# EAGLE board 7-segment (EAGLE 7.5.0)
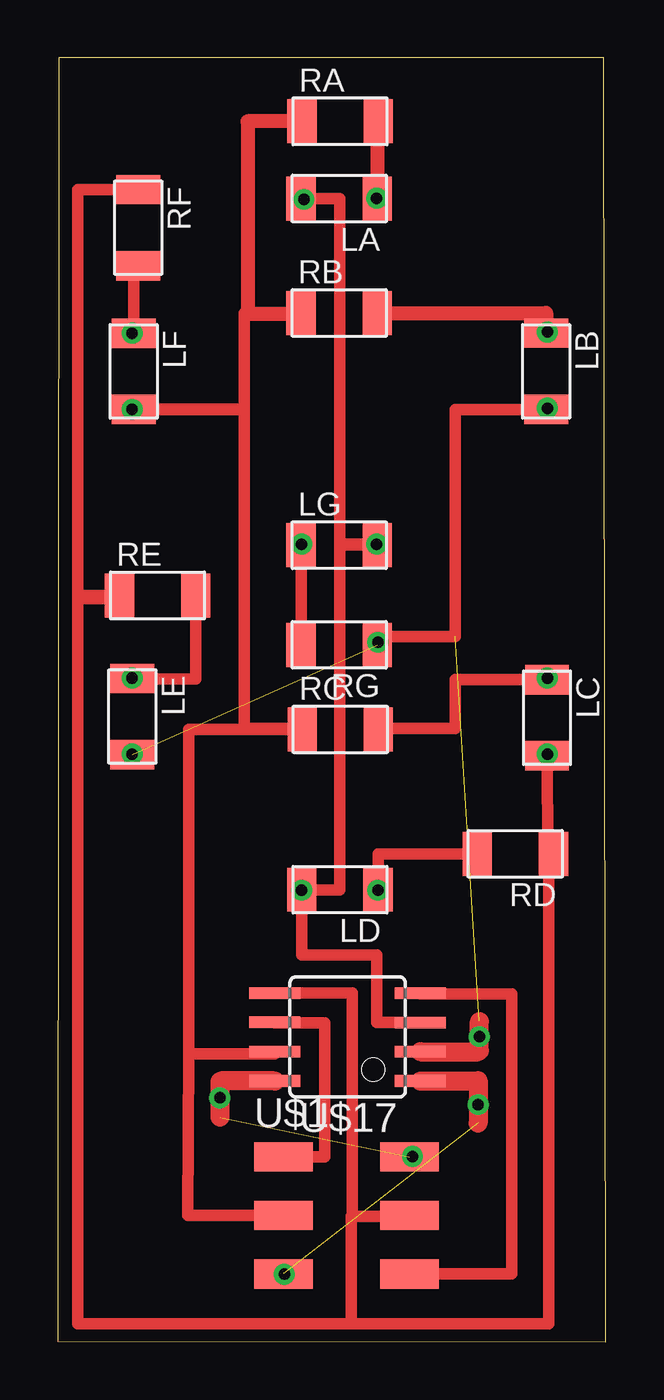
[diagram p0: board, top side]

Size 23.77 x 55.68 mm. Coordinates in mm from the lower left corner, seen from the top.
Outline: 0,0.02 23.77,0 23.67,55.68 0.05,55.68 0,0.02
Copper layers (1*16): Top 0.035mm / dielectric 1.5mm / Bottom 0.035mm
Design rules "fab": minimum track width 0.3mm, minimum drill 32mil, track to track 0.397mm, track to pad 0.397mm, pad to pad 0.397mm, via to via 0.397mm, smd to smd 0.315mm, copper to edge 40mil, drill to drill 16mil, minimum pad ring 10mil, minimum via ring 8mil, stop-mask expansion 4mil, vias tented up to drill 0mil, thermal gap 10mil
Net classes: 0 default: width 0.457 mm, clearance 1.626 mm

## Footprints (pad centres in the part's own frame; a part is rotated, then mirrored left to right if it is on the bottom)
LED1206FAB = smd 1.27 x 1.905: 1 -1.651,0; 2 1.651,0
R1206FAB = smd 1.27 x 1.905: 1 -1.651,0; 2 1.651,0
2X03SMD = smd 2.54 x 1.27: 1 -2.54,2.54; 2 2.92,2.54; 3 -2.54,0; 4 2.92,0; 5 -2.54,-2.54; 6 2.92,-2.54
SOIC8 = smd 0.5 x 2.2: 1 -1.905,-3.154; 2 -0.645,-3.154; 3 0.625,-3.154; 4 1.895,-3.154; 5 1.905,3.154; 6 0.635,3.154; 7 -0.635,3.154; 8 -1.905,3.154

## Placement (x,y rotation side)
LA  LEDFAB1206  [LED1206FAB]  12.2,49.57 180 top
LB  LEDFAB1206  [LED1206FAB]  21.17,42.08 270 top
LC  LEDFAB1206  [LED1206FAB]  21.21,27.06 270 top
LD  LEDFAB1206  [LED1206FAB]  12.23,19.61 180 top
LE  LEDFAB1206  [LED1206FAB]  3.24,27.11 270 top
LF  LEDFAB1206  [LED1206FAB]  3.29,42.08 270 top
LG  LEDFAB1206  [LED1206FAB]  12.2,34.54 0 top
RA  [R1206FAB]  12.24,52.92 0 top
RB  [R1206FAB]  12.2,44.61 0 top
RC  [R1206FAB]  12.25,26.55 0 top
RD  [R1206FAB]  19.84,21.16 180 top
RE  [R1206FAB]  4.33,32.36 0 top
RF  [R1206FAB]  3.49,48.31 270 top
RG  [R1206FAB]  12.2,30.22 180 top
U$1  AVRISPSMD  [2X03SMD]  12.33,5.49 0 top
U$17  ATTINY45SI  [SOIC8]  12.57,13.22 90 top

## Library data of the parts
LA LB LC LD LE LF LG RA RB RC RD RE RF RG U$1 U$17 = fab

## Nets
GND: U$1.6 U$17.4
MISO: U$1.1 U$17.6
MOSI: LC.2 RD.1 RE.1 RF.1 U$1.4 U$17.5
N$1: LA.1 RA.2
N$2: LB.1 RB.2
N$3: LC.1 RC.2
N$4: LD.1 RD.2
N$5: LE.1 RE.2
N$6: LF.1 RF.2
N$7: LG.1 RG.2
PB3: LB.2 LE.2 RG.1 U$17.2
PB4: LA.2 LD.2 LG.2 U$17.3
RST: U$1.5 U$17.1
SCK: LF.2 RA.1 RB.1 RC.1 U$1.3 U$17.7
VCC: U$1.2 U$17.8

## Tracks (layer width: path | path; a pad name or v marks a point on that pad's centre or on a via)
GND
  Top 0.508: U$1.6 19.68,2.94 19.68,15.08 15.72,15.08 U$17.4
MISO
  Top 0.508: U$1.1 11.58,8.02 11.58,13.83 9.41,13.83 U$17.6
MOSI
  Top 0.508: RF.1 0.88,49.96 0.88,32.23 2.68,32.23 RE.1 0.88,32.36 0.88,0.79 12.73,0.79 | LC.2 21.24,21.21 RD.1 21.28,21.26 21.28,0.79 12.73,0.79 | 12.73,0.79 12.73,5.44 12.78,5.44 | 12.78,5.44 15.25,5.44 U$1.4 | 12.78,5.44 12.78,15.13 U$17.5
N$1
  Top 0.61: RA.2 13.85,52.92 LA.1
N$2
  Top 0.61: RB.2 21.17,44.61 LB.1
N$3
  Top 0.508: 13.9,27.06 RC.2 13.9,26.59 17.23,26.59 17.23,28.71 LC.1
N$4
  Top 0.508: RD.2 13.88,21.16 LD.1
N$5
  Top 0.508: RE.2 5.98,28.73 3.24,28.73 LE.1
N$6
  Top 0.508: RF.2 3.29,46.66 LF.1
N$7
  Top 0.508: LG.1 RG.2
N$8  (via drill 0.5 pad 0.41)
  other vias: 10.68,49.53
N$9  (via drill 0.5 pad 0.41)
  other vias: 13.83,49.59
N$10  (via drill 0.5 pad 0.41)
  other vias: 3.23,43.73
N$11  (via drill 0.5 pad 0.41)
  other vias: 3.23,40.44
N$12  (via drill 0.5 pad 0.41)
  other vias: 21.23,43.78
N$13  (via drill 0.5 pad 0.41)
  other vias: 21.23,40.48
N$14  (via drill 0.5 pad 0.41)
  other vias: 10.58,34.59
N$15  (via drill 0.5 pad 0.41)
  other vias: 13.88,30.34
N$16  (via drill 0.5 pad 0.41)
  other vias: 3.23,25.48
N$17  (via drill 0.5 pad 0.41)
  other vias: 10.58,19.59
N$18  (via drill 0.5 pad 0.41)
  other vias: 13.88,19.59
N$19  (via drill 0.5 pad 0.41)
  other vias: 3.23,28.79
N$20  (via drill 0.5 pad 0.41)
  other vias: 21.23,28.79
N$21  (via drill 0.5 pad 0.41)
  other vias: 21.23,25.48
N$22  (via drill 0.5 pad 0.41)
  other vias: 18.28,13.23
N$23  (via drill 0.5 pad 0.41)
  other vias: 18.23,10.29
N$24  (via drill 0.5 pad 0.41)
  other vias: 9.83,2.94
N$25  (via drill 0.5 pad 0.41)
  other vias: 15.38,8.04
N$26  (via drill 0.5 pad 0.41)
  other vias: 7.03,10.58
PB3  (2 unrouted)
  Top 0.508: LB.2 17.23,40.43 17.23,30.59 13.85,30.59 RG.1 | 18.23,12.58 18.23,12.63
  Top 0.813: U$17.2 18.23,12.58 | 18.23,12.63 18.28,12.63 18.28,13.88
PB4  (via drill 0.5 pad 0.41)
  Top 0.508: LA.2 12.23,49.57 12.23,34.59 v13.83,34.59 13.85,34.59 LG.2 12.23,34.54 12.23,19.59 10.58,19.59 LD.2 10.58,16.79 13.83,16.79 13.83,13.85 U$17.3
RST  (1 unrouted)
  Top 0.508: 18.23,11.32 18.23,11.33
  Top 0.813: U$17.1 18.23,11.32 | 18.23,11.33 18.23,9.48
SCK
  Top 0.508: RB.1 8.08,44.61 8.08,40.44 LF.2 8.08,40.43 8.08,26.59 10.6,26.59 RC.1 | RC.1 10.62,26.55 | RC.1 5.68,26.55 5.68,12.48 | 5.68,12.48 9.41,12.48 U$17.7 | U$1.3 5.63,5.49 5.68,12.48
  Top 0.61: RA.1 8.23,52.92 8.23,44.59 10.55,44.59 RB.1
VCC  (1 unrouted)
  Top 0.508: 7.08,11.32 7.08,11.29
  Top 0.813: U$17.8 7.08,11.32 | 7.08,11.29 7.03,11.29 7.03,9.73